# Altium PCB GLCD.PcbDoc
Units mm, origin at the board's own origin, x right, y up, seen from the top; angles counter-clockwise.
Board outline 95 x 72.3 mm, 2 copper layers (Top Layer, Bottom Layer), stack 1.58 mm thick; 4 components, 14 nets, 46 pads, 8 vias.
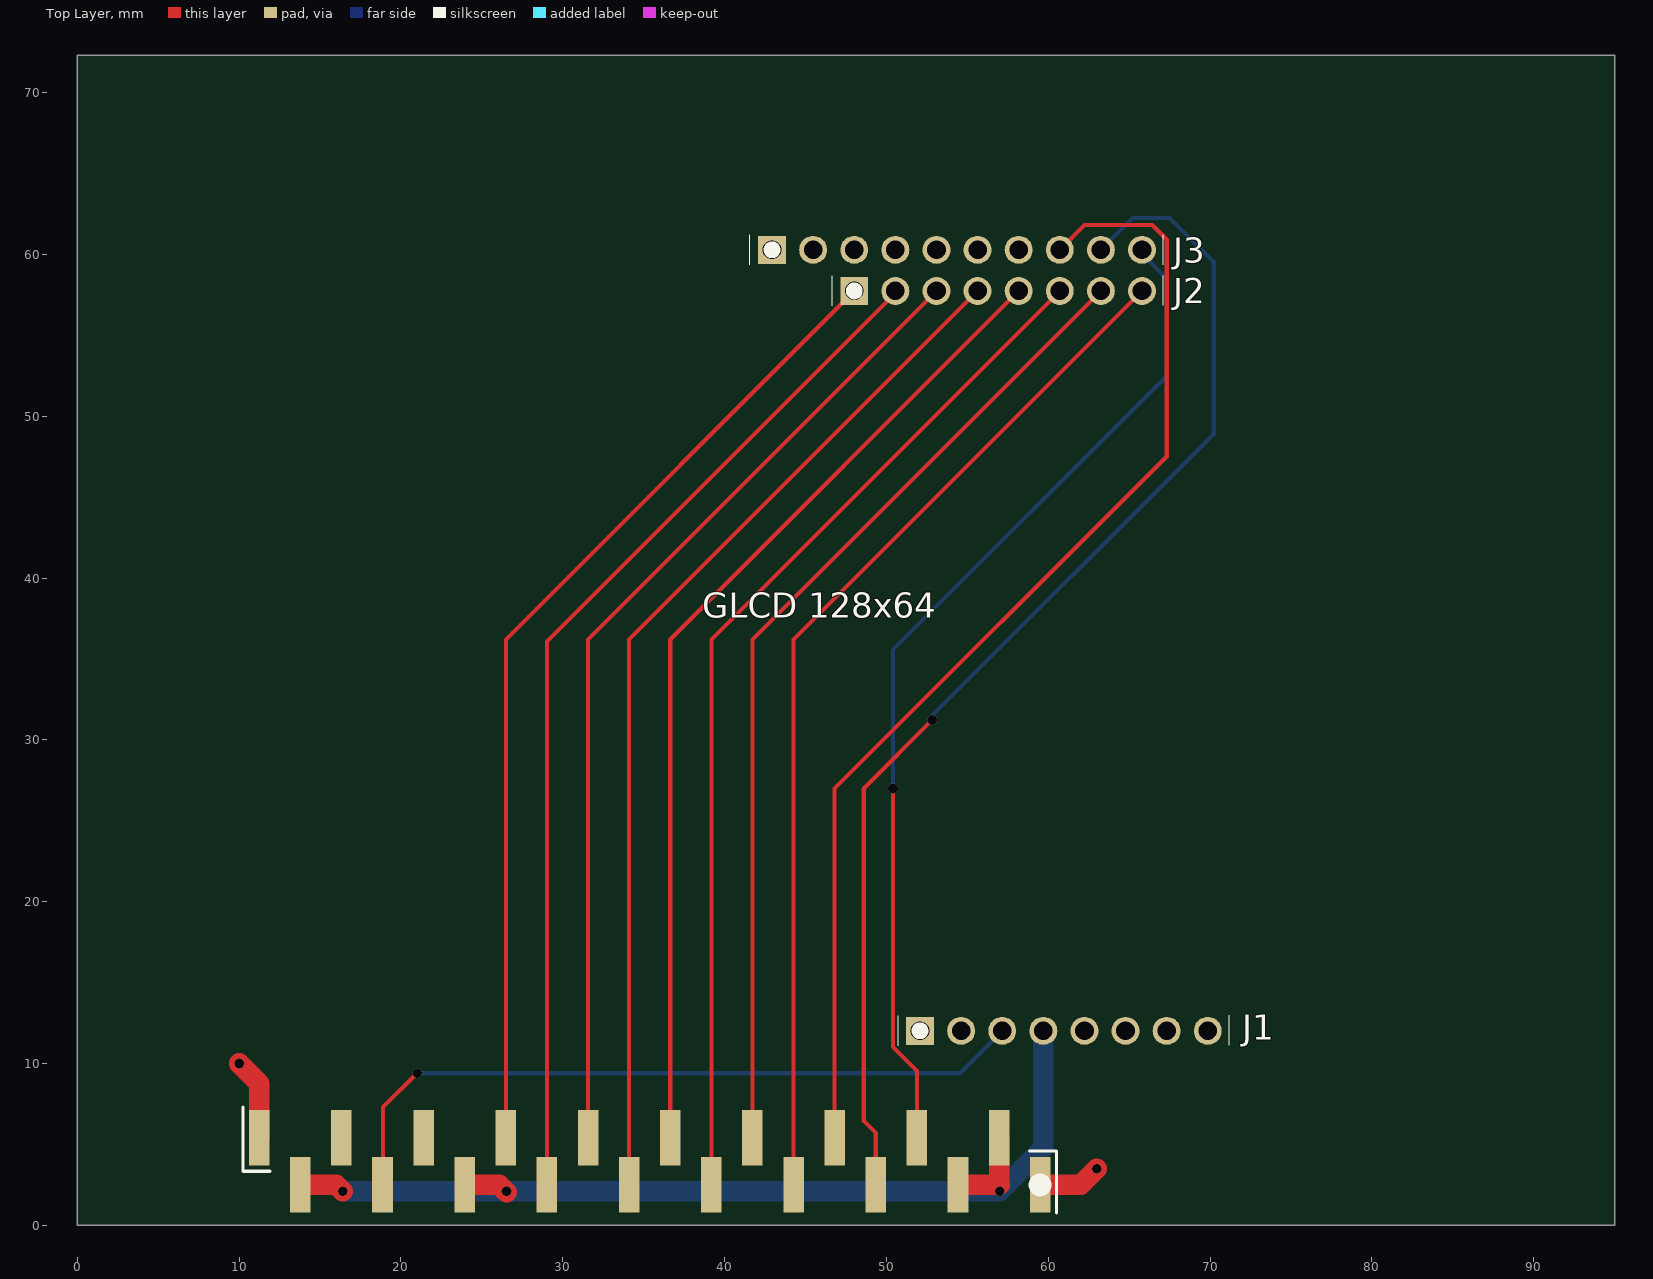
[diagram p0: Top Layer view]
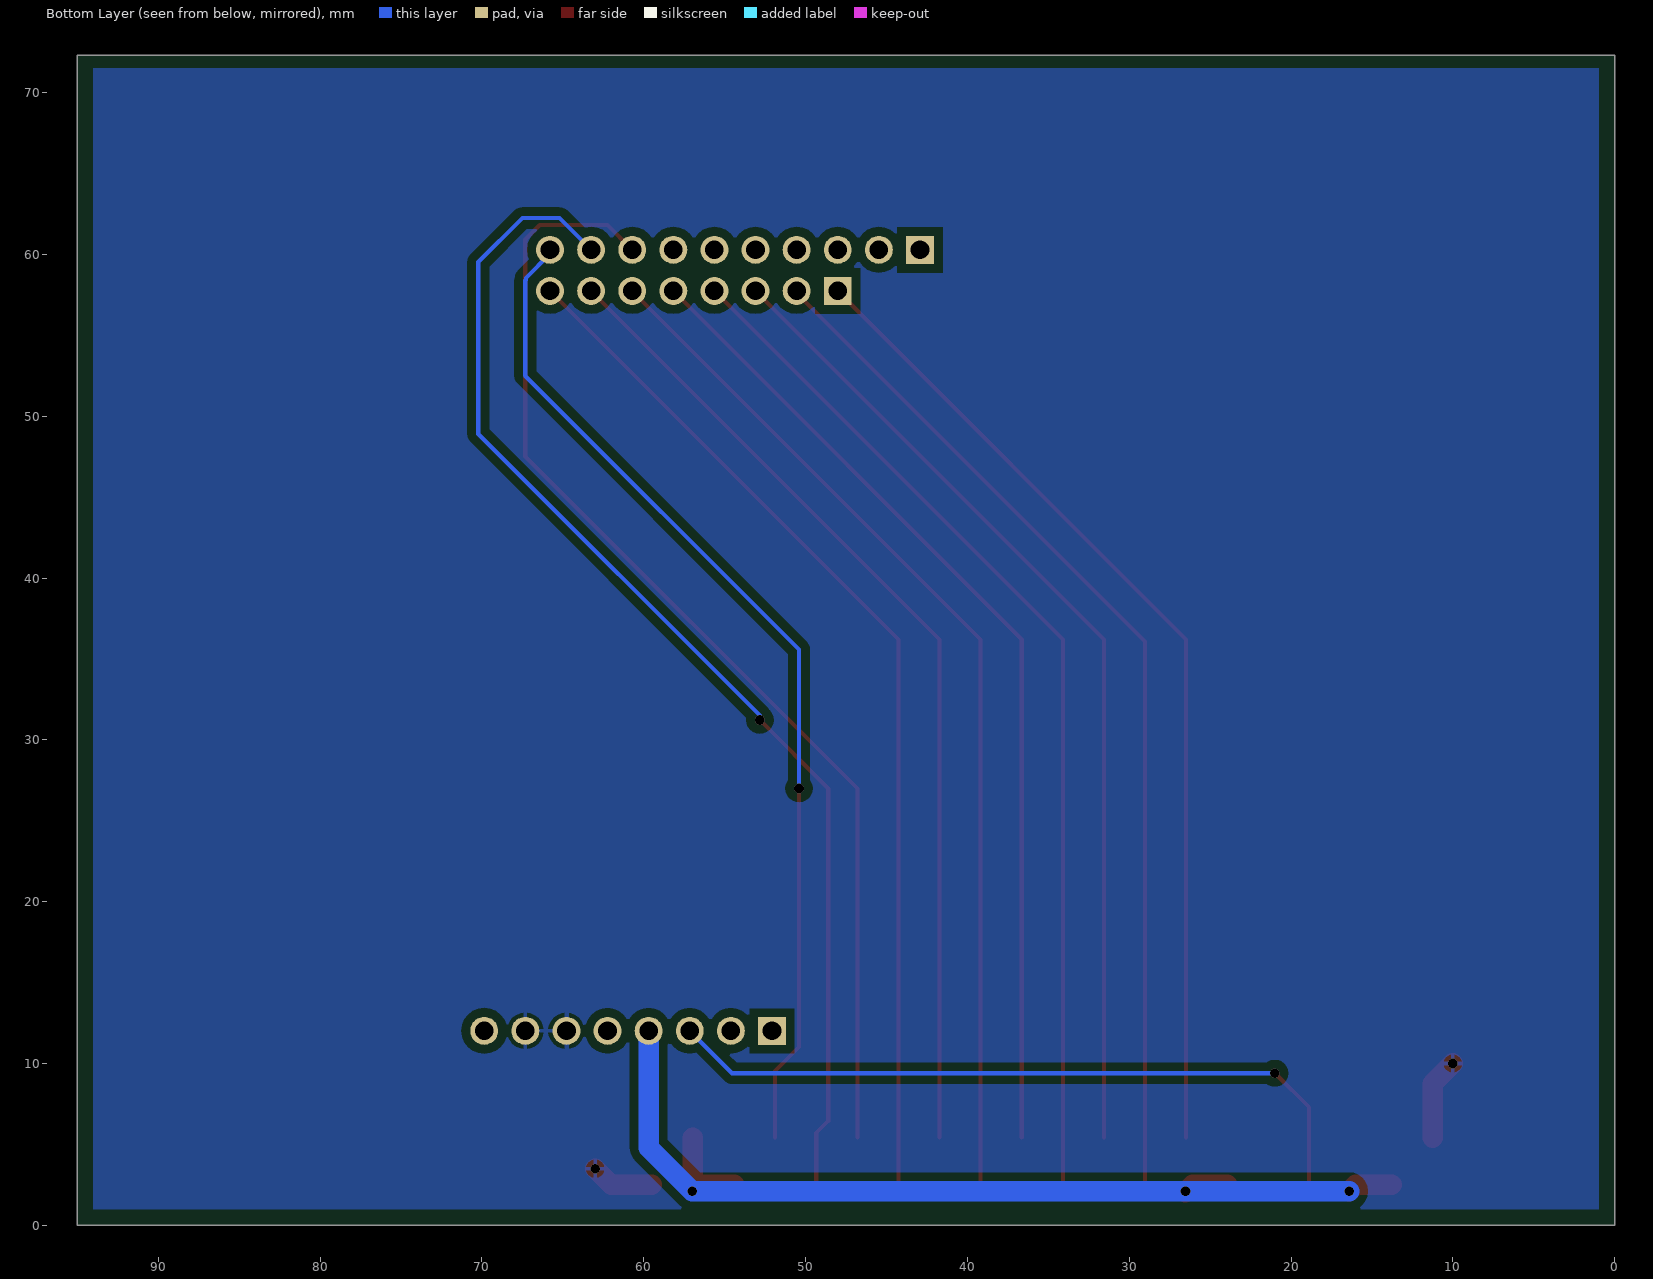
[diagram p1: Bottom Layer view, seen from below]
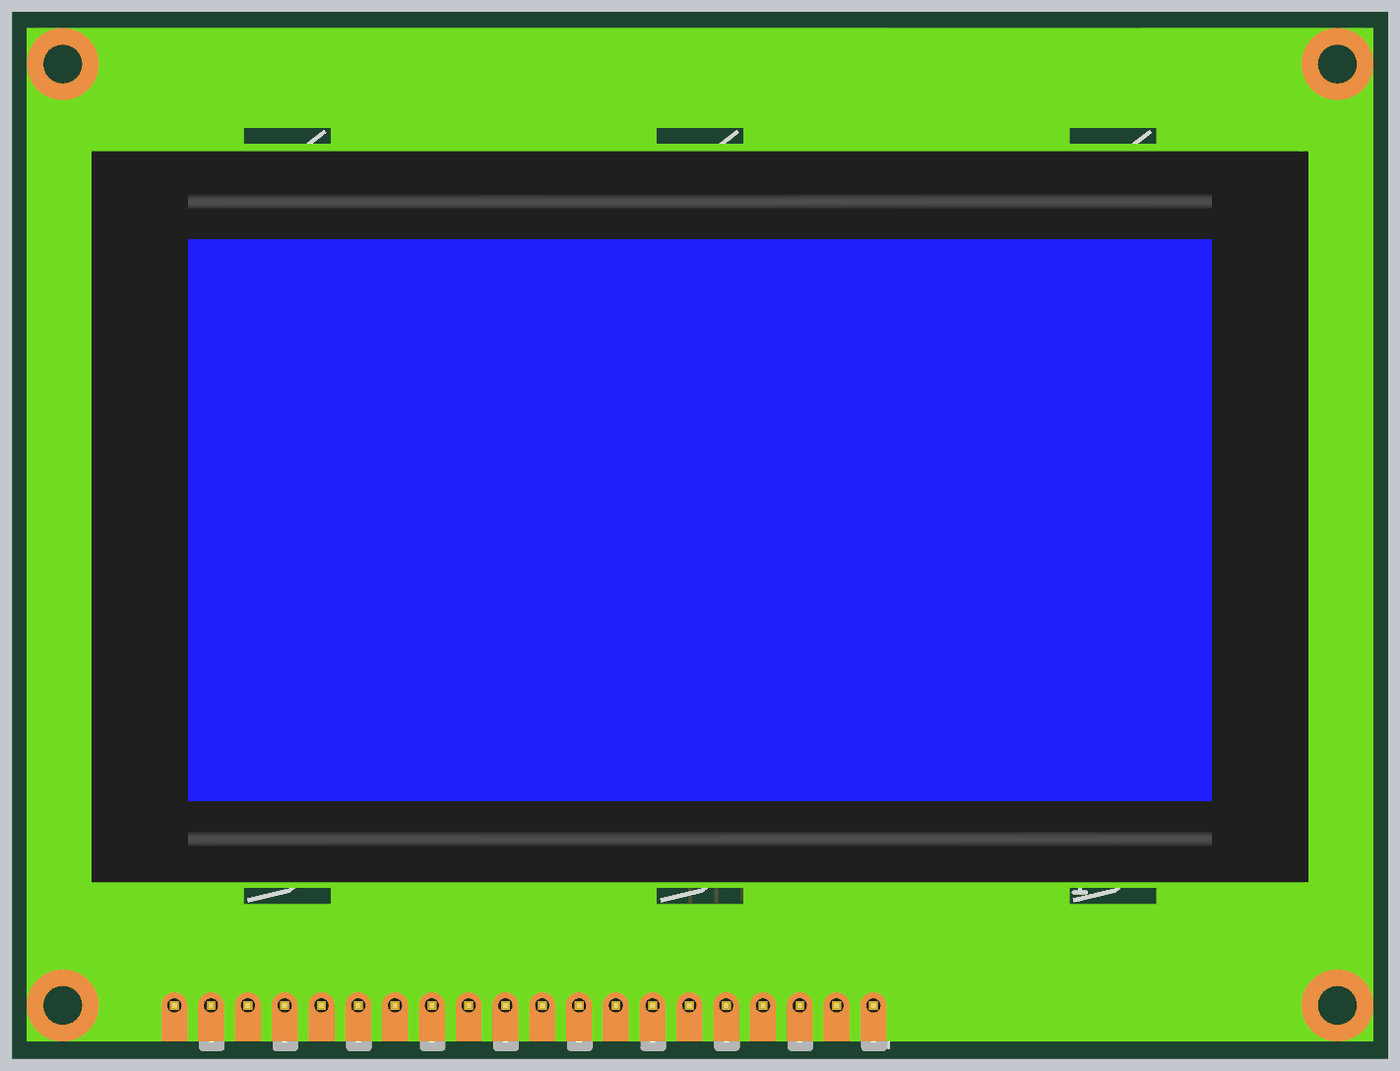
[diagram p2: 3D render of the assembled board from above, using the file's embedded part models]

## Layer stack, top to bottom
Top Solder: solder mask 0.01, Solder Resist, Dk 3.5
Top Layer: signal copper 0.036
Dielectric 1: dielectric 1.508, FR-4, Dk 4.8
Bottom Layer: signal copper 0.036
Bottom Solder: solder mask 0.01, Solder Resist, Dk 3.5

## Board outline
0,0 0,72.3 95,72.3 95,0

## Design rules (kind name [scope] priority, off if disabled: settings)
Clearance [All] p1: gap=0.54 ignorepadtopadclearanceinfootprint=FALSE except(0.152: SMDPad-SMDPad SMDPad-THPad THPad-THPad; 0.2: Via-Via; 0.254: Arc-Via Track-Via)
ComponentClearance [All] p1: gap=0 collisioncheckmode=3 verticalgap=0 showdistances=FALSE
PasteMaskExpansion [All] p1: expansion=0.254
PolygonConnect [All] p1: connectstyle=Relief reliefconductorwidth=0.254 reliefentries=4 polygonreliefangle="90 Angle" airgapwidth=0.254
RoutingVias [All] p1: holewidth=0.6 width=0.6 viastyle="Through Hole" minholewidth=0.6 minwidth=0.6 maxholewidth=0.6 maxwidth=0.6
SilkToSolderMaskClearance [IsText] p1: minsilkscreentomaskgap=0.254 clearancetoexposedcopper=TRUE
SolderMaskExpansion [All] p1: expansion=0.05 istentingtop=FALSE
Width [All] p1: maxlimit=1.27 minlimit=0.254 preferedwidth=0.254
27 further rules are at their usual default settings.

## Components (designator, comment, footprint, x,y, rotation, side; value= is the part's Value field where it differs from the comment)
"GLCD 128x64" "GLCD" GLCD 0.99,1.145 r0 top
J1 "Connector 1" "1X8 HEADER" 52.074,12.02 r0 top
J2 "Connector 2" "1X8 HEADER" 48.01,57.74 r0 top
J3 "Connector 3" "1X10 HEADER" 42.93,60.28 r0 top

## Footprints (in the part's own frame and the unit in brackets; to place one, negate y for a bottom-side part, rotate by r counter-clockwise, add the part's x,y. Pads: shape width x height; smd on the part's side, far side on the other; paste and mask are expansions set on the pad)
"1X8 HEADER" [mm]
  rect 1.725x1.725 hole 1.15: 1(0,0)
  round 1.725 hole 1.15: 2(2.54,0) 3(5.08,0) 4(7.62,0) 5(10.16,0) 6(12.7,0) 7(15.24,0) 8(17.78,0)
  silkscreen extent -1.35,-0.92 19.1,0.95, body extent -1.29,-1.2 19.03,1.21, height 5.85
"1X10 HEADER" [mm]
  rect 1.725x1.725 hole 1.15: 1(0,0)
  round 1.725 hole 1.15: 2(2.54,0) 3(5.08,0) 4(7.62,0) 5(10.16,0) 6(12.7,0) 7(15.24,0) 8(17.78,0) 9(20.32,0) 10(22.86,0)
  silkscreen extent -1.38,-0.92 24.18,0.92, body extent -1.3,-1.18 24.1,1.23, height 5.85
GLCD [mm] "Graphic LCD 128x64"
  rect 1.27x3.43 smd: 1(58.51,1.355) 2(55.97,4.275) 3(53.43,1.355) 4(50.89,4.275) 5(48.35,1.355) 6(45.81,4.275) 7(43.27,1.355) 8(40.73,4.275) 9(38.19,1.355) 10(35.65,4.275) 11(33.11,1.355) 12(30.57,4.275) 13(28.03,1.355) 14(25.49,4.275) 15(22.95,1.355) 16(20.41,4.275) 17(17.87,1.355) 18(15.33,4.275) 19(12.79,1.355) 20(10.25,4.275)
  silkscreen extent 9.25,-0.38 59.52,6.17, body extent 0,0 93,70.04, height 15.02

## Part data
"GLCD 128x64": "Graphic LCD 128x64"
J1 J2: "1x8 Header", Manufacturer_Name=Amphenol, Manufacturer_Part_Number=10129378-908001BLF, Mouser Part Number=649-1012937890801BLF, Datasheet Link=https://cdn.amphenol-icc.com/media/wysiwyg/files/drawing/10129378.pdf, Height=8.58mm, Mouser Price/Stock=https://www.mouser.com/Search/Refine.aspx?Keyword=649-1012937890801BLF
J3: "1x10 Header"

## Via types
v1: diameter 0.6, hole 0.6, Top Layer to Bottom Layer, tented both sides, 8 vias

## Nets (pads, with @x,y where several pads share a name; then routed paths per layer and width w, separated by ;. In a path a pad name is that pad's centre, name@x,y a point inside that pad or via, vN(x,y) a via of type N, cw(c..) or ccw(c..) an arc to the next point about the centre after c; other vN are vias at no path point)
+3V3: "GLCD 128x64.2" "GLCD 128x64.3" "GLCD 128x64.15" "GLCD 128x64.19" J1.4 | length 62.8
  Top Layer w1.27: 13.78,2.5 16,2.5 v1(16.4,2.1) ; 23.94,2.5 26.075,2.5 v1@26.525,2.05 ; 54.42,2.5 57,2.5 56.96,2.54 56.96,5.42 ; J1.4 J1.4@59.781,11.933
  Bottom Layer w1.27: v1(16.4,2.1) v1(26.525,2.1) v1(57,2.1) 59.694,4.794 J1.4
GND: "GLCD 128x64.1" "GLCD 128x64.20" J1.6 J1.7 | length 9.1
  Top Layer w1.27: v1(10,10) 11.24,8.76 11.24,5.42 ; 59.5,2.5 62,2.5 v1(63,3.5) ; J1.6 J1.6@64.861,12.107
IO8: "GLCD 128x64.4" J3.10 | length 63.1
  Top Layer w0.254: v1(50.4,27) 50.4,11.026 51.88,9.546 51.88,5.42
  Bottom Layer w0.254: v1(50.4,27) 50.4,35.577 67.319,52.496 67.319,58.374 67.275,58.418 67.275,58.55 65.79,60.035 J3.10
IO9: "GLCD 128x64.5" J3.9 | length 75.2
  Top Layer w0.254: 49.34,2.5 49.34,5.707 48.6,6.447 48.6,26.973 48.628,27 48.628,27.028 v1(52.825,31.225)
  Bottom Layer w0.254: v1(52.825,31.225) 52.825,31.5 70.225,48.9 70.225,59.519 67.5,62.244 65.214,62.244 63.325,60.355 63.325,60.35 63.255,60.28 J3.9
IO10: "GLCD 128x64.6" J3.8 | length 71.8
  Top Layer w0.254: 46.8,5.42 46.8,27 67.319,47.519 67.319,60.914 66.424,61.809 62.239,61.809 60.775,60.345 60.775,60.2 60.71,60.265 J3.8
IO34: "GLCD 128x64.7" J2.8 | length 64.2
  Top Layer w0.254: 44.26,2.5 44.26,36.21 J2.8
IO35: "GLCD 128x64.8" J2.7 | length 61.2
  Top Layer w0.254: 41.72,5.42 41.72,36.21 J2.7
IO36: "GLCD 128x64.9" J2.6 | length 64.2
  Top Layer w0.254: 39.18,2.5 39.18,36.21 J2.6
IO37: "GLCD 128x64.10" J2.5 | length 61.2
  Top Layer w0.254: 36.64,5.42 36.64,36.21 J2.5
IO38: "GLCD 128x64.11" J2.4 | length 64.2
  Top Layer w0.254: 34.1,2.5 34.1,36.21 J2.4
IO39: "GLCD 128x64.12" J2.3 | length 61.2
  Top Layer w0.254: 31.56,5.42 31.56,36.21 J2.3
IO40: "GLCD 128x64.13" J2.2 | length 64.2
  Top Layer w0.254: 29.02,2.5 29.02,36.082 50.55,57.612 J2.2
IO41: "GLCD 128x64.14" J2.1 | length 61.2
  Top Layer w0.254: 26.48,5.42 26.48,36.21 J2.1
RST: "GLCD 128x64.17" J1.3 | length 45
  Top Layer w0.254: 18.86,2.5 18.9,2.54 18.9,7.3 v1(21,9.4)
  Bottom Layer w0.254: v1(21,9.4) 54.534,9.4 J1.3
pads on no net: "GLCD 128x64.16" "GLCD 128x64.18" J1.1 J1.2 J1.5 J1.8 J3.1 J3.2 J3.3 J3.4 J3.5 J3.6 J3.7

## Polygon pours and split planes (outlines as drawn)
GND on Bottom Layer "GND_L02_P015" (solid, pour order 15): 94,71.5 1,71.5 1,1 94,1
no net on Bottom Layer "NONET_L02_P014" (solid, pour order 14): 1,1
no net on Bottom Layer "NONET_L02_P000" (solid, pour order 0): 58.575,10.15

## Silkscreen, mask and mechanical layers (free items; w line width, h text height)
Board Outline:
  the board outline again, w0.1